# EAGLE board SPINDLE ADAPTER (EAGLE 7.6.0)
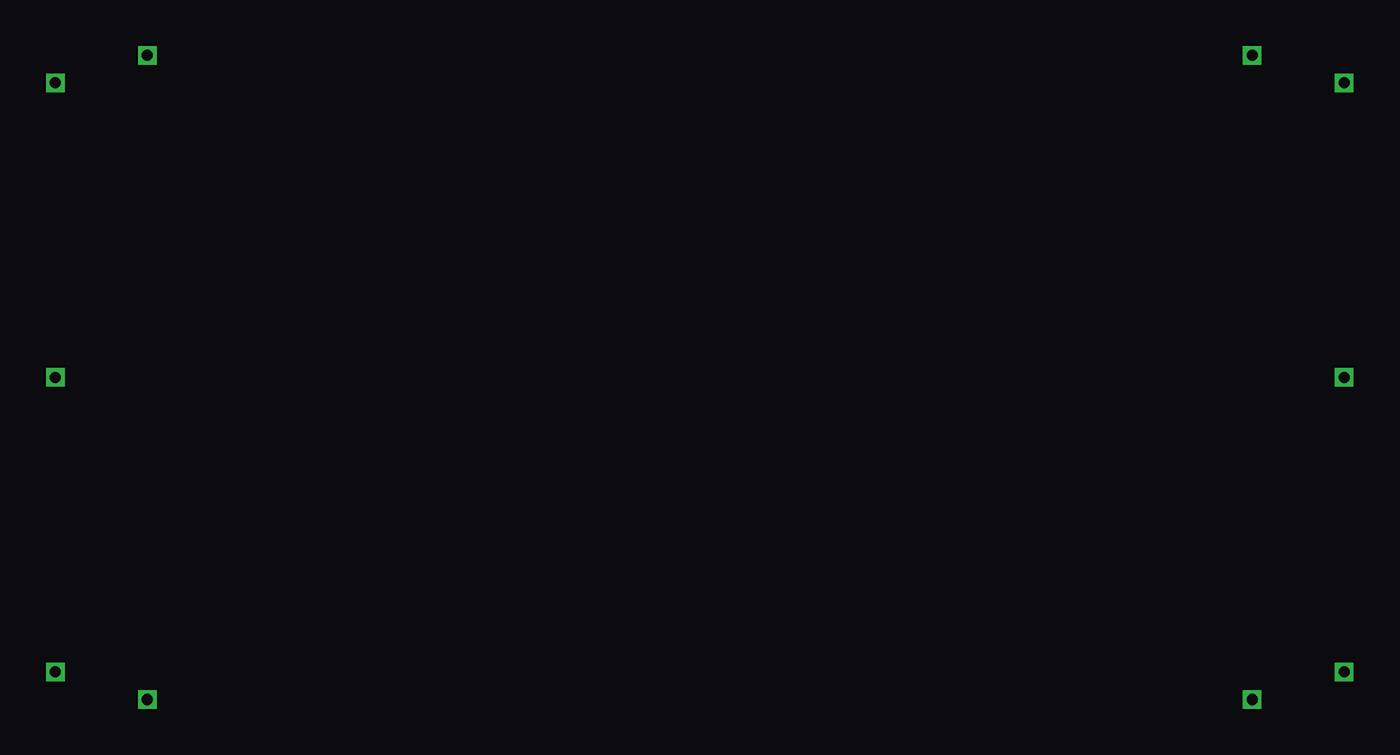
[diagram p0: board, top side]

No outline drawn. Coordinates in mm, seen from the top.
Copper layers (1*16): Top 0.035mm / dielectric 1.5mm / Bottom 0.035mm
Design rules "default": minimum track width 10mil, minimum drill 24mil, track to track 8mil, track to pad 8mil, pad to pad 8mil, via to via 8mil, smd to smd 8mil, copper to edge 40mil, drill to drill 8mil, minimum pad ring 10mil, minimum via ring 8mil, stop-mask expansion 4mil, vias tented up to drill 0mil, thermal gap 10mil

## Placement (x,y rotation side)
E$1  [A4L-LOC]  -85.5,-65 0 top

## Library data of the parts
E$1 = frames

## Tracks (layer width: path | path; a pad name or v marks a point on that pad's centre or on a via)
S$1  (via drill 0.6)
  other vias: 15,7.5
S$2  (via drill 0.6)
  other vias: 15,42.5
S$3  (via drill 0.6)
  other vias: 75,7.5
S$4  (via drill 0.6)
  other vias: 75,42.5
S$5  (via drill 0.6)
  other vias: 10,41
S$6  (via drill 0.6)
  other vias: 80,41
S$7  (via drill 0.6)
  other vias: 10,9
S$8  (via drill 0.6)
  other vias: 80,9
S$9  (via drill 0.6)
  other vias: 10,25
S$10  (via drill 0.6)
  other vias: 80,25

## Text on the board
Dimension: casa
Measures: meow ^__^